# Altium PCB PCB1.PcbDoc
Units mil, origin at the board's own origin, x right, y up, seen from the top; angles counter-clockwise.
Board outline 10840 x 6750 mil, 2 copper layers (Top Layer, Bottom Layer); 119 components, 55 nets, 303 pads, 2 vias.
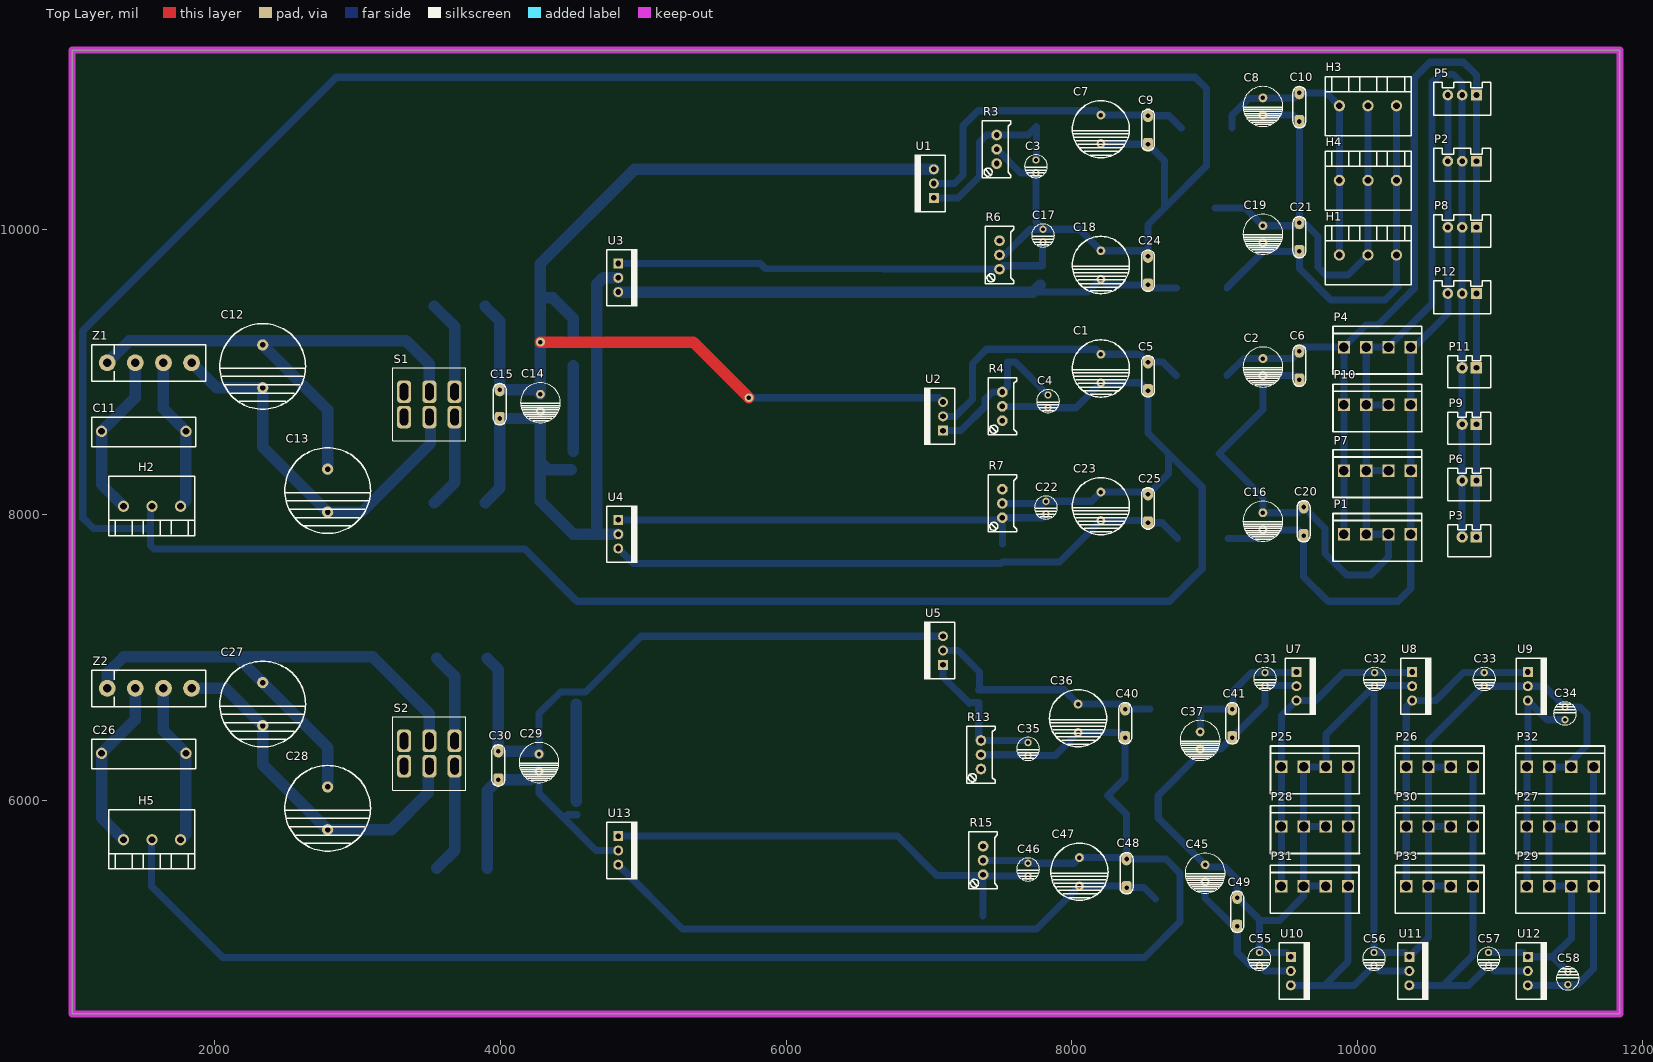
[diagram p0: Top Layer view]
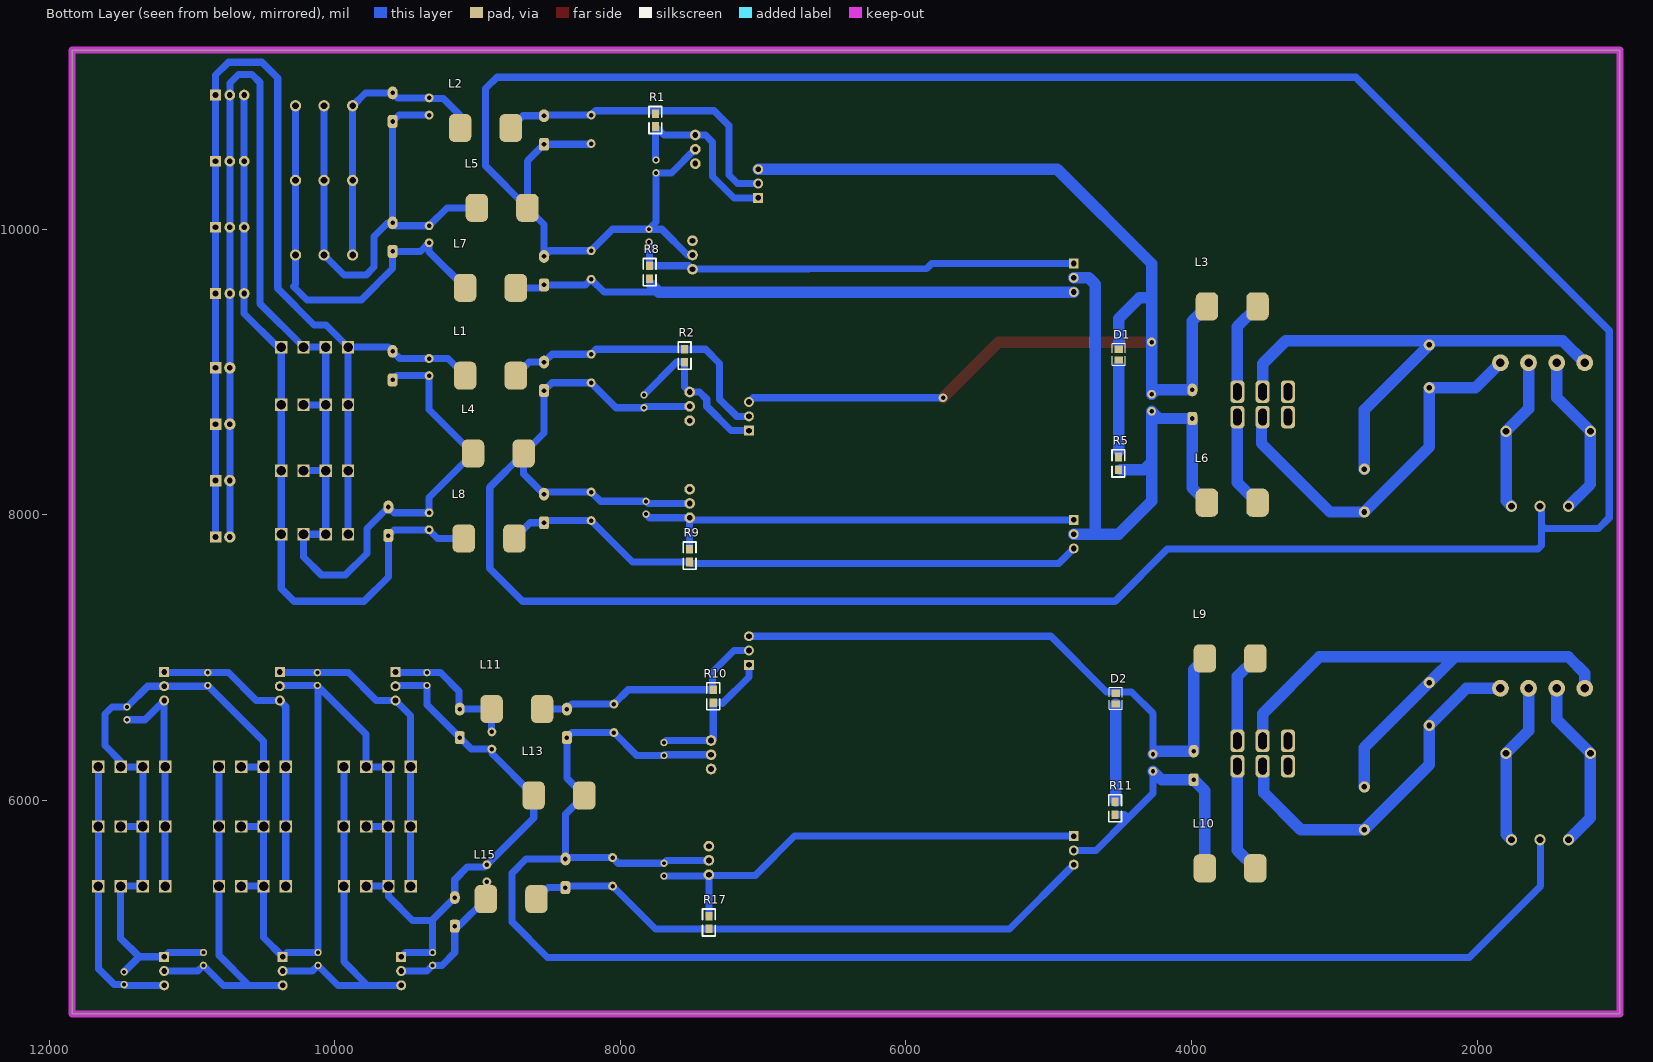
[diagram p1: Bottom Layer view, seen from below]

## Layer stack, top to bottom
Top Solder: solder mask 0.4, Solder Resist, Dk 3.5
Top Layer: signal copper 1.4
Dielectric 1: dielectric 12.6, FR-4, Dk 4.8
Bottom Layer: signal copper 1.4
Bottom Solder: solder mask 0.4, Solder Resist, Dk 3.5

## Board outline
1000,4505 11840,4505 11840,11255 1000,11255

## Design rules (kind name [scope] priority, off if disabled: settings)
Clearance [All] p1: gap=10
PolygonConnect [All] p1: connectstyle=Relief reliefconductorwidth=10 reliefentries=4 polygonreliefangle="90 Angle" airgapwidth=10
RoutingVias [All] p1: holewidth=28 width=50 viastyle="Through Hole" minholewidth=28 minwidth=50 maxholewidth=28 maxwidth=50
SolderMaskExpansion [All] p1: expansion=4
Width [All] p1: maxlimit=100 minlimit=6 preferedwidth=10
30 further rules are at their usual default settings.

## Components (designator, comment, footprint, x,y, rotation, side; value= is the part's Value field where it differs from the comment)
C1 "470uf" CD-5mm 8205,9125 r90 top
C2 "22uf" CD-3mm 9340,9095 r90 top
C3 "Cap-AL" CD-2.2mm 7750,10485 r90 top
C4 "Cap-AL" CD-2.2mm 7835,8840 r90 top
C5 "Cap-SEMI" 独石电容 8535,8870 r0 top
C6 "Cap-SEMI" 独石电容 9595,8945 r0 top
C7 "470uf" CD-5mm 8205,10800 r90 top
C8 "22uf" CD-3mm 9340,10920 r90 top
C9 "Cap-SEMI" 独石电容 8535,10595 r0 top
C10 "Cap-SEMI" 独石电容 9595,10755 r0 top
C11 "Cap1" 安规电容 1797.48,8585 r90 top
C12 "2200uf" CD-7.6mm 2335,9190 r90 top
C13 "2200uf" CD-7.6mm 2790,8320 r90 top
C14 "Cap-AL" CD-3mm 4280,8845 r90 top
C15 "0.1uf" 独石电容 3995,8675 r0 top
C16 "22uf" CD-3mm 9340,8015 r90 top
C17 "Cap-AL" CD-2.2mm 7800,10000 r90 top
C18 "470uf" CD-5mm 8205,9850 r90 top
C19 "22uf" CD-3mm 9340,10025 r90 top
C20 "Cap-SEMI" 独石电容 9625,7855 r0 top
C21 "Cap-SEMI" 独石电容 9595,9845 r0 top
C22 "Cap-AL" CD-2.2mm 7820,8095 r90 top
C23 "470uf" CD-5mm 8205,8160 r90 top
C24 "Cap-SEMI" 独石电容 8535,9610 r0 top
C25 "Cap-SEMI" 独石电容 8535,7945 r0 top
C26 "Cap1" 安规电容 1797.48,6330 r90 top
C27 "2200uf" CD-7.6mm 2335,6825 r90 top
C28 "2200uf" CD-7.6mm 2790,6095 r90 top
C29 "Cap-AL" CD-3mm 4270,6325 r90 top
C30 "0.1uf" 独石电容 3985,6145 r0 top
C31 "2.2uf" CD-2.2mm 9355,6895 r90 top
C32 "2.2uf" CD-2.2mm 10122.5,6895 r90 top
C33 "2.2uf" CD-2.2mm 10890,6895 r90 top
C34 "1uf" CD-2.2mm 11455,6565 r270 top
C35 "Cap-AL" CD-2.2mm 7695,6405 r90 top
C36 "470uf" CD-5mm 8045,6675 r90 top
C37 "22uf" CD-3mm 8900,6480 r90 top
C40 "Cap-SEMI" 独石电容 8375,6440 r0 top
C41 "Cap-SEMI" 独石电容 9125,6440 r0 top
C45 "22uf" CD-3mm 8935,5550 r90 top
C46 "Cap-AL" CD-2.2mm 7695,5560 r90 top
C47 "470uf" CD-5mm 8055,5600 r90 top
C48 "Cap-SEMI" 独石电容 8385,5390 r0 top
C49 "Cap-SEMI" 独石电容 9160,5120 r0 top
C55 "2.2uf" CD-2.2mm 9315,4935 r90 top
C56 "2.2uf" CD-2.2mm 10117.5,4935 r90 top
C57 "2.2uf" CD-2.2mm 10920,4935 r90 top
C58 "1uf" CD-2.2mm 11475,4710 r270 top
D1 "LED" 0805_s 4496.22,9101.73 r270 bottom
D2 "LED" 0805_s 4516.22,6691.93 r270 bottom
H1 "KF128-5.08-3P" KF128-5.08-3P 9875,9820 r180 top
H2 "KF128-5.08-3P" KF128-5.08-3P 1760,8060 r0 top
H3 "KF128-5.08-3P" KF128-5.08-3P 9875,10865 r180 top
H4 "KF128-5.08-3P" KF128-5.08-3P 9875,10342.5 r180 top
H5 "KF128-5.08-3P" KF128-5.08-3P 1760,5725 r0 top
L1 "SMD" "功率电感-12x12 - duplicate" 8910,8975 r0 bottom
L2 "SMD" "功率电感-12x12 - duplicate" 8945,10710 r0 bottom
L3 "SMD" "功率电感-12x12 - duplicate" 3715,9460 r0 bottom
L4 "SMD" "功率电感-12x12 - duplicate" 8855,8430 r0 bottom
L5 "SMD" "功率电感-12x12 - duplicate" 8827.83,10150 r0 bottom
L6 "SMD" "功率电感-12x12 - duplicate" 3715,8085 r0 bottom
L7 "SMD" "功率电感-12x12 - duplicate" 8910,9590 r0 bottom
L8 "SMD" "功率电感-12x12 - duplicate" 8920,7835 r0 bottom
L9 "SMD" "功率电感-12x12 - duplicate" 3730,6995 r0 bottom
L10 "SMD" "功率电感-12x12 - duplicate" 3730,5525 r0 bottom
L11 "SMD" "功率电感-12x12 - duplicate" 8725,6640 r0 bottom
L13 "SMD" "功率电感-12x12 - duplicate" 8430,6035 r0 bottom
L15 "SMD" "功率电感-12x12 - duplicate" 8765,5310 r0 bottom
P1 "VH3.96-4P" VH3.96-4P 9830.51,8010 r0 top
P2 "XH2.54-3p" XH2.54-3p 10835,10476.67 r180 top
P3 "Power_2Port" Power_S_2Port 10835,7845 r180 top
P4 "VH3.96-4P" VH3.96-4P 9830.51,9320.67 r0 top
P5 "XH2.54-3p" XH2.54-3p 10835,10940 r180 top
P6 "Power_2Port" Power_S_2Port 10835,8240 r180 top
P7 "VH3.96-4P" VH3.96-4P 9830.51,8455.67 r0 top
P8 "XH2.54-3p" XH2.54-3p 10835,10013.33 r180 top
P9 "Power_2Port" Power_S_2Port 10835,8635 r180 top
P10 "VH3.96-4P" VH3.96-4P 9830.51,8915.67 r0 top
P11 "Power_2Port" Power_S_2Port 10835,9030 r180 top
P12 "XH2.54-3p" XH2.54-3p 10835,9550 r180 top
P25 "VH3.96-4P" VH3.96-4P 9392.32,6380.67 r0 top
P26 "VH3.96-4P" VH3.96-4P 10266.42,6380.67 r0 top
P27 "VH3.96-4P" VH3.96-4P 11111.42,5963.17 r0 top
P28 "VH3.96-4P" VH3.96-4P 9392.32,5963.17 r0 top
P29 "VH3.96-4P" VH3.96-4P 11111.42,5545.67 r0 top
P30 "VH3.96-4P" VH3.96-4P 10266.42,5963.17 r0 top
P31 "VH3.96-4P" VH3.96-4P 9391.42,5545.67 r0 top
P32 "VH3.96-4P" VH3.96-4P 11111.42,6380.67 r0 top
P33 "VH3.96-4P" VH3.96-4P 10266.42,5545.67 r0 top
R1 "RES" 0805 7755,10720 r90 bottom
R2 "RES" 0805 7550,9070 r90 bottom
R3 "可调电位器1" 电位器 7475,10460 r90 top
R4 "可调电位器1" 电位器 7515,8660 r90 top
R5 "RES" 0805 4512,8315 r90 bottom
R6 "可调电位器1" 电位器 7495,9720 r90 top
R7 "可调电位器1" 电位器 7515,7980 r90 top
R8 "RES" 0805 7795,9655 r90 bottom
R9 "RES" 0805 7515,7670 r90 bottom
R10 "RES" 0805 7350,6685 r90 bottom
R11 "RES" 0805 4535,5900 r90 bottom
R13 "可调电位器1" 电位器 7365,6220 r90 top
R15 "可调电位器1" 电位器 7380,5480 r90 top
R17 "RES" 0805 7380,5100 r90 bottom
S1 "双掷开关" SWITCH 3679.33,8685 r180 top
S2 "双掷开关" SWITCH 3325,6417.17 r0 top
U1 "LM317" TO-220 7035,10220 r90 top
U2 "LM317" TO-220 7100,8590 r90 top
U3 "LM337" TO-220 4825,9760 r270 top
U4 "LM337" TO-220 4825,7965 r270 top
U5 "LM317" TO-220 7100,6950 r90 top
U7 "7812" TO-220 9575,6900 r270 top
U8 "7809" TO-220 10385,6900 r270 top
U9 "7805" TO-220 11195,6900 r270 top
U10 "7912" TO-220 9535,4905 r270 top
U11 "7909" TO-220 10365,4905 r270 top
U12 "7905" TO-220 11195,4905 r270 top
U13 "LM337" TO-220 4825,5750 r270 top
Z1 "整流桥" 整流桥 1246.3,9065 r90 top
Z2 "整流桥" 整流桥 1246.3,6785 r90 top

## Footprints (in the part's own frame and the unit in brackets; to place one, negate y for a bottom-side part, rotate by r counter-clockwise, add the part's x,y. Pads: shape width x height; smd on the part's side, far side on the other; paste and mask are expansions set on the pad)
0805 [mil]
  rect 60x50 smd: 1(0,0) 2(90,0)
  silkscreen extent -50,-45 140,45
0805_s [mm]
  rect 1.3x1.499 smd: 1(0.425,-0.35) 2(-1.475,-0.35)
  silkscreen extent -2.47,-1.49 1.43,0.79
CD-2.2mm [mm]
  round 1.3 hole 0.7: 1(0,0) 2(-2.286,0)
  silkscreen extent -3.16,-2.04 0.92,2.04
CD-3mm [mil]
  round 62 hole 31.5: 1(0,0) 2(-120,0)
  silkscreen extent -200,-140 80,140
CD-5mm [mil]
  round 62 hole 31.5: 1(0,0) 2(-200,0)
  silkscreen extent -300,-200 100,200
CD-7.6mm [mm]
  round 2 hole 1: 1(0,0) 2(-7.62,0)
  silkscreen extent -11.43,-7.62 3.81,7.62
KF128-5.08-3P [mm]
  round 2 hole 1.2: 1(0,0) 2(-5.08,0) 3(-10.16,0)
  silkscreen extent -12.76,-5.2 2.54,5.3, body extent -12.66,-5.1 2.34,5.2, height 14.1
Power_S_2Port [mil]
  rect 80x80 hole 40: 1(0,0)
  round 80 hole 40: 2(100,0)
  silkscreen extent -100,-85 200,140
SWITCH [mm]
  rrect50% 2.5x4 hole 1.5 slot 3 at 90 deg: 1(0,0) 2(4.5,0) 3(9,0) 4(9,-4.5) 5(4.5,-4.5) 6(0,-4.5)
  silkscreen extent -2,-8.75 11,4.25, body extent -1.85,-8.18 10.85,3.63, height 30.58
TO-220 [mil]
  rect 70x70 hole 40: 1(0,0)
  round 70 hole 40: 2(100,0) 3(200,0)
  silkscreen extent -102,-80 302,135
VH3.96-4P [mm]
  rect 2.2x2.2 hole 1.7: 1(1.95,-3.7) 2(5.91,-3.7) 3(9.87,-3.7) 4(13.83,-3.7)
  silkscreen extent 0,-8.5 15.87,0
XH2.54-3p [mil]
  rect 75x75 hole 40: 1(0,0)
  round 75 hole 40: 2(100,0) 3(200,0)
  silkscreen extent -100,-90 300,140
"功率电感-12x12 - duplicate" [mm]
  rrect50% 4x5 smd: 1(-4.5,0) 2(4.5,0)
  body extent -6.08,-6.15 6.21,6.15, height 8
安规电容 [mm]
  round 2 hole 1.2: 1(0,0) 2(0,15)
  silkscreen extent -2.75,-1.75 2.5,16.75, body extent -2.75,-1.75 2.6,16.75, height 13
整流桥 [mm]
  round 3 hole 1.5: 1(0,0) 2(0,-5) 3(0,-10) 4(0,-15)
  silkscreen extent -3.25,-17.5 3.25,2.75
独石电容 [mil]
  rrect50% 70x90 hole 32: 1(0,0)
  oval 70x90 hole 32: 2(0,200)
  silkscreen extent -45,-45 45,245, body extent -77,-18 73,218, height 335
电位器 [mil]
  round 75 hole 40: 1(0,0) 2(100,0) 3(200,0)
  silkscreen extent -100,-100 300,100

## Part data
C1 C2 C7 C8 C16 C18 C19 C23 C31 C32 C33 C34 C36 C37 C45 C47 C55 C56 C57 C58: library part Cap-AL
C12 C13 C27 C28: library part Cap
C15 C30: library part Cap-SEMI
L1 L2 L3 L4 L5 L6 L7 L8 L9 L10 L11 L13 L15: library part 功率电感
U7 U8 U9: library part 78XX
U10 U11 U12: library part 79XX

## Via types
v1: diameter 62, hole 31.5, Top Layer to Bottom Layer, 2 vias

## Nets (pads, with @x,y where several pads share a name; then routed paths per layer and width w, separated by ;. In a path a pad name is that pad's centre, name@x,y a point inside that pad or via, vN(x,y) a via of type N, cw(c..) or ccw(c..) an arc to the next point about the centre after c; other vN are vias at no path point)
+5: C34.1 P27.1 P29.1 P32.1 U9.3 | length 1618.7
  Bottom Layer w50: P29.1 P27.1 P32.1 11195,6241.81 U9.3 11330,6565 C34.1
+9: C33.1 P26.1 P30.1 P33.1 U8.3 U9.1 | length 2210.2
  Bottom Layer w50: P33.1 P30.1 P26.1 10343.19,6658.19 U8.3 10550,6700 10745,6895 C33.1 11190,6895 U9.1
+12: C32.1 P25.1 P28.1 P31.1 U7.3 U8.1 | length 2237.1
  Bottom Layer w50: P31.1 9469.09,5400.91 P28.1 P25.1 9469.09,6594.09 U7.3 9710,6700 9905,6895 C32.1 10380,6895 U8.1
-5: C58.1 P27.4 P29.4 P32.4 U12.3 | length 1923
  Bottom Layer w50: U12.3 11470,4705 C58.1 11545,4710 11655.91,4820.91 P29.4 P27.4 P32.4
-9: C57.2 P26.4 P30.4 P33.4 U11.3 U12.2 | length 2521.9
  Bottom Layer w50: U11.3 10600,4705 ; P26.4 P30.4 P33.4 10810.91,4915.91 10600,4705 ; U12.2 10960,4805 C57.2 10780,4705 10600,4705
-12: C56.2 P25.4 P28.4 P31.4 U10.3 U11.2 | length 2503.7
  Bottom Layer w50: U10.3 9770,4705 ; P25.4 P28.4 9936.81,5400.91 P31.4 9935.91,4870.91 9770,4705 ; U11.2 10157.5,4805 C56.2 9977.5,4705 9770,4705
GND1: C1.2 C3.2 C4.2 C5.1 C7.2 C9.1 C17.1 C18.1 C22.1 C23.1 C24.2 C25.2 H2.2 L4.1 L5.1 R3.2 R4.2 R6.2 R7.2 | length 26399.1
  Bottom Layer w50: H2.2 1550,8050 1550,7930 ; R3.2 7477.53,10560 7642.53,10395 C3.2 7750,10050 C17.1 ; R6.2 7530,9820 7710,10000 C17.1 ; R7.2 7805,8080 C22.1 8140,8095 C23.1 8520,8160 C25.2 8677.83,8287.83 L4.1 ; R4.2 C4.2@7825,8760 ; C4.2 8030,8750 C1.2 8480,8925 C5.1 8535,8572.83 L4.1 ; C7.2 8210,10595 C9.1 8650.67,10479.33 L5.1 ; 1550,7930 1550,7785 1575,7760 4170,7760 4535,7395 8685,7395 8915,7625 8915,8192.83 L4.1 ; 1550,7930 1525,7905 1150,7905 1075,7980 1075,9290 2850,11065 8865,11065 8945,10985 8945,10444.33 L5.1 ; C17.1 8055,10000 C18.1 8495,9850 C24.2 8535,10034.33 L5.1
GND2: C35.2 C36.2 C40.1 C46.1 C47.1 C48.2 H5.2 L13.1 R13.2 R15.2 | length 11681.3
  Bottom Layer w50: H5.2 1555,5720 1555,5400 2055,4900 8510,4900 8760,5150 8760,5490 8660,5590 C48.2 ; R13.2 7690,6320 C35.2 7885,6315 C36.2 8340,6475 C40.1 8375,6157.17 L13.1 8385,5902.83 C48.2 ; R15.2 7675,5580 C46.1 8015,5560 C47.1 8375,5600 C48.2
GND-HIGH_ADJ: C8.2 C10.1 C19.1 C21.2 H1.2 H3.2 H4.2 L5.2 | length 3493.8
  Bottom Layer w50: L5.2 9215,10150 C19.1 9575,10025 C21.2 ; C8.2 9550,10800 C10.1 C21.2 ; H3.2 H4.2 H1.2 9935,9680 9780,9680 9725,9735 9725,9950 9630,10045 C21.2
GND_ALPHA: C31.2 C32.2 C33.2 C34.2 C37.2 C41.1 C45.1 C49.2 C55.1 C56.1 C57.1 C58.2 L13.2 P25.2 P25.3 P26.2 P26.3 P27.2 P27.3 P28.2 P28.3 P29.2 P29.3 P30.2 P30.3 P31.2 P31.3 P32.2 P32.3 P33.2 P33.3 U7.2 U8.2 U9.2 U10.1 U11.1 U12.1 | length 14205
  Bottom Layer w50: U10.1 9505,4935 C55.1 9315,5165 ; U7.2 9570,6805 C31.2 9355,6670 C41.1 9045,6360 C37.2 8900,6327.83 L13.2 8607.17,5877.83 C45.1 8950,5535 9070,5535 9160,5445 C49.2 9315,5165 ; P31.3 P31.2 ; P28.3 P28.2 ; U8.2 10380,6805 C32.2 C32.2@10117.5,6800 ; P33.3 P33.2 ; P30.3 P30.2 ; P26.3 P26.2 ; C57.1 11165,4935 U12.1 11370,4905 ; C58.2 11370,4905 ; P27.3 P27.2 ; 9315,5165 9320,5160 9455,5160 9624.09,5329.09 P31.2 ; P31.2 9625,5400.91 P28.2 ; P28.2 P25.2 P25.3 9780.91,6463.41 C32.2@10117.5,6800 ; C32.2@10117.5,6800 C56.1 10335,4935 U11.1 10499.09,5039.09 P33.2 ; P33.2 P30.2 ; P30.2 P26.2 ; P26.2 10499.09,6414.09 C33.2 10895,6800 U9.2 11310,6800 C34.2 11560,6655 11610,6605 11610,6385 11500,6275 P32.3 P32.2 P27.2 ; P27.2 P29.2 P29.3 11500,5035 11370,4905
NetC1_1: C1.1 C5.2 L1.1 R2.2 U2.2 | length 2050.6
  Bottom Layer w50: U2.2 7185,8690 7305,8810 7305,9060 7405,9160 R2.2 8170,9160 C1.1 8480,9125 C5.2 8637.83,9070 L1.1
NetC2_1: C2.1 C6.2 L1.2 P1.1 P2.1 P3.1 P4.1 P5.1 P6.1 P7.1 P8.1 P9.1 P10.1 P11.1 P12.1 | length 8104
  Bottom Layer w50: L1.2 9207.17,9095 C2.1 9545,9095 C6.2 9625,9175 P4.1 ; P1.1 P7.1 P10.1 P4.1 ; P3.1 P6.1 P9.1 P11.1 P12.1 P8.1 P2.1 P5.1 10835,11080 10745,11170 10510,11170 10400,11060 10400,9585 10145,9330 10062.28,9330 P4.1
NetC2_2: C2.2 C6.1 C16.1 C20.2 L4.2 P1.2 P1.3 P2.2 P3.2 P4.2 P4.3 P5.2 P6.2 P7.2 P7.3 P8.2 P9.2 P10.2 P10.3 P11.2 P12.2 | length 10242.6
  Bottom Layer w50: C6.1 9565,8975 C2.2 9340,8737.83 L4.2 9340,8122.17 C16.1 9585,8015 C20.2 9775,7905 9775,7730 9925,7580 10095,7580 10219.09,7704.09 P1.3 P1.2 P7.2 ; P7.3 P7.2 ; P10.3 P10.2 ; P3.2 P6.2 P9.2 P11.2 P12.2 P8.2 P2.2 P5.2 10735,11025 10675,11085 10580,11085 10525,11030 10525,9480.91 P4.3 P4.2 P10.2 ; P7.2 P10.2
NetC3_1: C3.1 R1.1 R3.3 U1.1 | length 1304.8
  Bottom Layer w50: U1.1 7205,10220 7355,10370 7355,10610 7405,10660 R3.3 7695,10660 R1.1 7755,10490 C3.1
NetC4_1: C4.1 R2.1 R4.3 U2.1 | length 1160.9
  Bottom Layer w50: U2.1 7225,8590 7395,8760 7395,8810 7445,8860 R4.3 7550,8895 R2.1 7605,9070 C4.1
NetC4_2: 
NetC7_1: C7.1 C9.2 L2.1 R1.2 U1.2 | length 2195.9
  Bottom Layer w50: U1.2 7180,10320 7240,10380 7240,10725 7345,10830 8175,10830 C7.1 8530,10800 C9.2 8682.83,10795 L2.1
NetC8_1: C8.1 C10.2 H1.1 H3.1 H4.1 L2.2 | length 1987.7
  Bottom Layer w50: L2.2 9122.17,10797.17 9240,10915 9335,10915 C8.1 9560,10920 C10.2 9785,10955 H3.1 H4.1 H1.1
NetC11_1: C11.1 H2.1 Z1.3 | length 1085.8
  Bottom Layer w80: Z1.3 1640,8742.48 C11.1 1797.48,8097.48 H2.1
NetC11_2: C11.2 H2.3 Z1.2 | length 1166.2
  Bottom Layer w80: H2.3 1206.93,8213.07 C11.2 1443.15,8821.22 Z1.2
NetC12_1: C12.1 C13.1 S1.5 Z1.1 | length 3683.8
  Bottom Layer w80: Z1.1 1401.3,9220 2305,9220 ; C13.1 2790,8735 C12.1 2305,9220 ; S1.5 3502.17,9057.83 3340,9220 2305,9220
NetC12_2: C12.2 C13.2 S1.2 Z1.4 | length 2736.2
  Bottom Layer w80: Z1.4 2011.85,8890 C12.2 2335,8475 C13.2 3030,8020 3510,8500 3510,8677.17 S1.2
NetC16_2: C16.2 C20.1 L8.2 P1.4 P2.3 P4.4 P5.3 P7.4 P8.3 P10.4 P12.3 | length 5294.3
  Bottom Layer w50: L8.2 9280,7835 C16.2 9585,7895 C20.1 9625,7565 9795,7395 10285,7395 10375,7485 P1.4 P7.4 P10.4 P4.4 10400,9175 10635,9410 P12.3 P8.3 P2.3 P5.3
NetC17_2: C17.2 R6.1 R8.2 U3.1 | length 3161.9
  Bottom Layer w50: U3.1 5820,9760 5855,9725 R6.1 7520,9745 R8.2 7795,9905 C17.2
NetC18_2: C18.2 C24.1 L7.1 R8.1 U3.3 | length 4040.7
  Bottom Layer w50: 7730,9560 8115,9560 C18.2 8245,9610 C24.1 8555,9590 L7.1
  Bottom Layer w80: U3.3 7730,9560 7780,9610
NetC19_2: C19.2 C21.1 H1.3 H3.3 H4.3 L7.2 | length 2916.3
  Bottom Layer w50: L7.2 9340,9842.83 C19.2 9400,9845 C21.1 9595,9725 9815,9505 10195,9505 10290,9600 10275,9615 H1.3 H4.3 H3.3
NetC22_2: C22.2 R7.1 R9.2 U4.1 | length 3196.6
  Bottom Layer w50: U4.1 7500,7965 R7.1 ; 7515,7795 R7.1 ; C22.2 7795,7980 R7.1
NetC23_2: C23.2 C25.1 L8.1 R9.1 U4.3 | length 4123.2
  Bottom Layer w50: U4.3 4930,7660 R9.1@7505,7660 ; R9.1 7915,7670 C23.2 8520,7960 C25.1 8632.83,7945 L8.1
NetC26_1: C26.1 H5.1 Z2.3 | length 1140.8
  Bottom Layer w80: Z2.3 1640,6487.48 C26.1 1797.48,5762.48 H5.1
NetC26_2: C26.2 H5.3 Z2.2 | length 1221.2
  Bottom Layer w80: H5.3 1206.93,5878.07 C26.2 1443.15,6566.22 Z2.2
NetC27_1: C27.1 C28.1 S2.2 Z2.1 | length 3937.5
  Bottom Layer w80: Z2.1 1246.3,6891.3 1360,7005 2155,7005 ; C28.1 2790,6370 C27.1 2155,7005 ; S2.2 3502.17,6607.83 3105,7005 2155,7005
NetC27_2: C27.2 C28.2 S2.5 Z2.4 | length 2525
  Bottom Layer w80: Z2.4 2075,6785 C27.2 2335,6250 C28.2 3235,5795 3495,6055 3495,6232.83 S2.5
NetC31_1: C31.1 C37.1 C41.2 L11.2 U7.1 | length 1011.7
  Bottom Layer w50: C37.1 8902.17,6482.17 L11.2 C41.2 9130,6645 9130,6765 9260,6895 C31.1 9570,6895 U7.1
NetC35_1: C35.1 R10.1 R13.3 U5.1 | length 1021.1
  Bottom Layer w50: U5.1 7100,6865 7285,6680 7290,6685 R10.1 7350,6435 R13.3 7680,6420 C35.1
NetC36_1: C36.1 C40.2 L11.1 R10.2 U5.2 | length 1698
  Bottom Layer w50: U5.2 7205,7050 7355,6900 7355,6780 R10.2 7945,6775 C36.1 8340,6675 C40.2 L11.1
NetC38_1: 
NetC39_1: 
NetC39_2: 
NetC44_1: 
NetC45_2: C45.2 C49.1 C55.2 L15.2 U10.2 | length 1033.4
  Bottom Layer w50: C45.2 8935,5317.17 L15.2 9132.17,5120 C49.1 9160,4935 9250,4845 C55.2 9355,4805 U10.2
NetC46_2: C46.2 R15.1 R17.2 U13.1 | length 3263.9
  Bottom Layer w50: U13.1 6780,5750 7055,5475 R15.1@7380,5475 ; R17.2 R15.1@7380,5475 ; R15.1 R15.1@7380,5475 ; R15.1@7390,5470 C46.2
NetC47_2: C47.2 C48.1 L15.1 R17.1 U13.3 | length 4110.8
  Bottom Layer w50: U13.3 5275,5100 R17.1 7755,5100 C47.2 8375,5400 C48.1 8507.83,5390 L15.1
NetC50_2: 
NetC51_2: 
NetC53_2: 
NetD1_1: D1.1 R5.2 | length 600
  Bottom Layer w80: 4510,8445 4510,9045
NetD2_1: D2.1 R11.2 | length 680.2
  Bottom Layer w80: R11.2@4530,5995 D2.1
NetL3_1: L3.1 S1.6 | length 656.4
  Bottom Layer w80: L3.1 3679.33,9318.5 S1.6
NetL6_1: L6.1 S1.1 | length 658.6
  Bottom Layer w80: L6.1 3679.33,8226.5 S1.1
NetL9_1: L9.1 S2.3 | length 630.2
  Bottom Layer w80: L9.1 3679.33,6868.5 S2.3
NetL10_1: L10.1 S2.4 | length 767.4
  Bottom Layer w80: L10.1 3679.33,5651.5 S2.4
POW1+: C14.1 C15.2 D1.2 L3.2 U1.3 U2.3 | length 8317.4
  Top Layer w80: v1(4280,9210) 5350,9210 v1(5740,8820)
  Bottom Layer w50: v1(5740,8820) 7070,8820 U2.3
  Bottom Layer w80: L3.2 3995,9357.17 C15.2 4250,8875 C14.1 v1(4280,9210) 4280,9520 ; 4510,9210 4510,9375 4365,9520 4280,9520 ; U1.3 4940,10420 4280,9760 4280,9520
POW1-: C14.2 C15.1 L6.2 R5.1 U3.2 U4.2 | length 4365
  Bottom Layer w80: L6.2 3995,8187.83 C15.1 4230,8675 C14.2 4280,8370 ; R5.1@4495,8315 4335,8315 4280,8370 ; U4.2 4675,7865 ; U3.2 4720,9660 4675,9615 4675,7865 ; 4280,8370 4280,8095 4510,7865 4675,7865
POW2+: C29.1 C30.2 D2.2 L9.2 U5.3 | length 4314.2
  Bottom Layer w50: C29.1 4270,6610 4420,6760 4595,6760 4985,7150 U5.3
  Bottom Layer w80: L9.2 3985,6917.17 C30.2 4250,6345 C29.1
POW2-: C29.2 C30.1 L10.2 R11.1 U13.2 | length 1938.1
  Bottom Layer w50: C29.2 4270,6050 4445,5875 ; R11.1 4470,5900 4445,5875 ; U13.2 4670,5650 4445,5875
  Bottom Layer w80: L10.2 3907.17,6067.17 C30.1 4210,6145 C29.2
pads on no net: R3.1 R4.1 R6.3 R7.3 R13.1 R15.3 S1.3 S1.4 S2.1 S2.6

## Keep-outs
Keep-Out Layer:
  the board outline again, w47.24